# Altium PCB Microneedle_Patch_Mirrored.PcbDoc
Units mm, origin at the board's own origin, x right, y up, seen from the top; angles counter-clockwise.
Board outline 30.8 x 93 mm, 2 copper layers (Top, Bottom), stack 0.137 mm thick; 33 components, 33 nets, 708 pads, 16 vias.
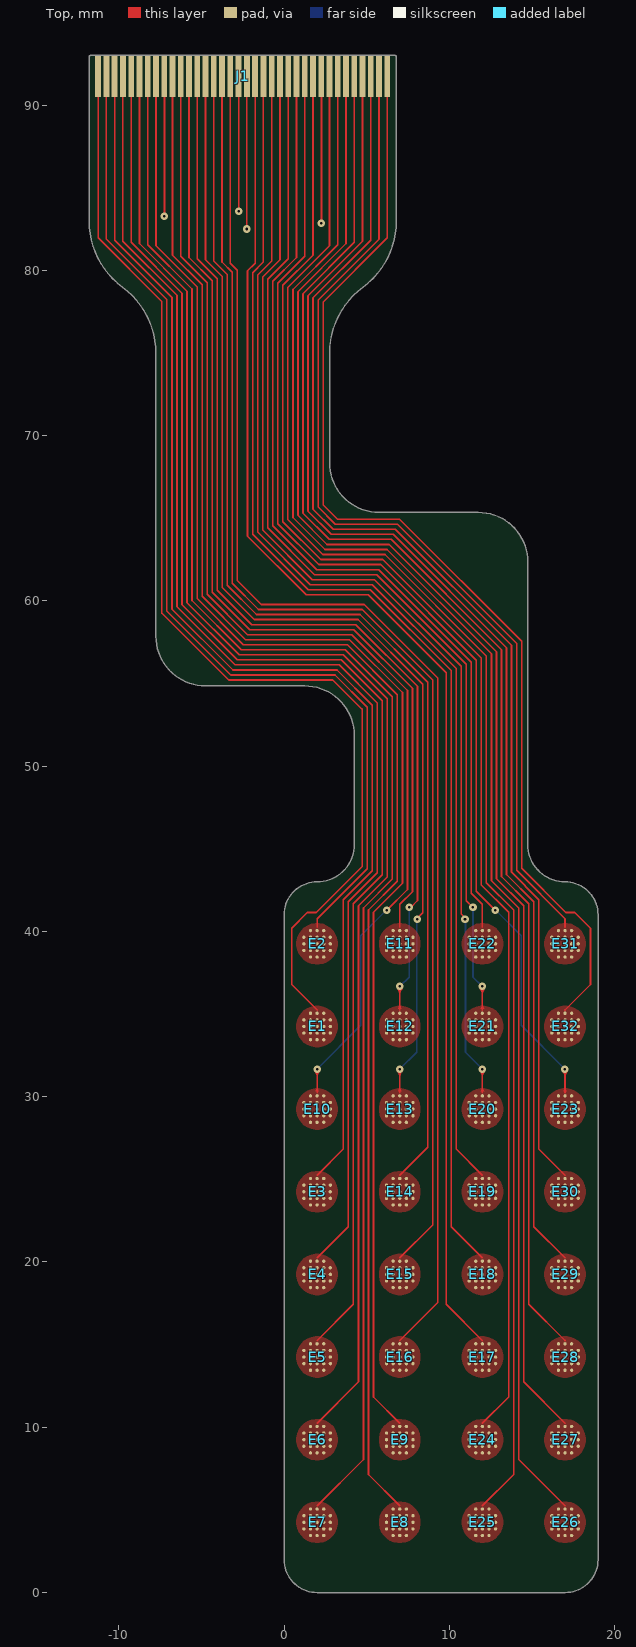
[diagram p0: Top view]
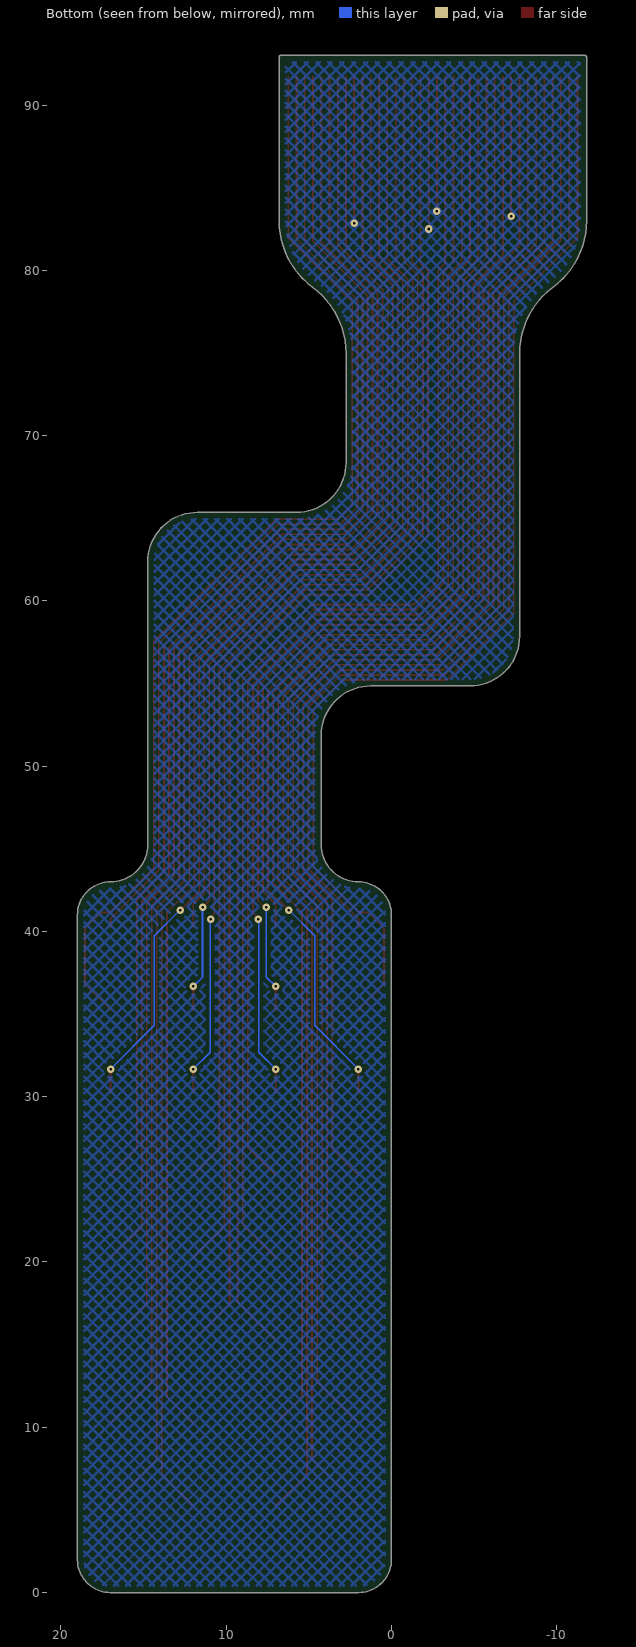
[diagram p1: Bottom view, seen from below]
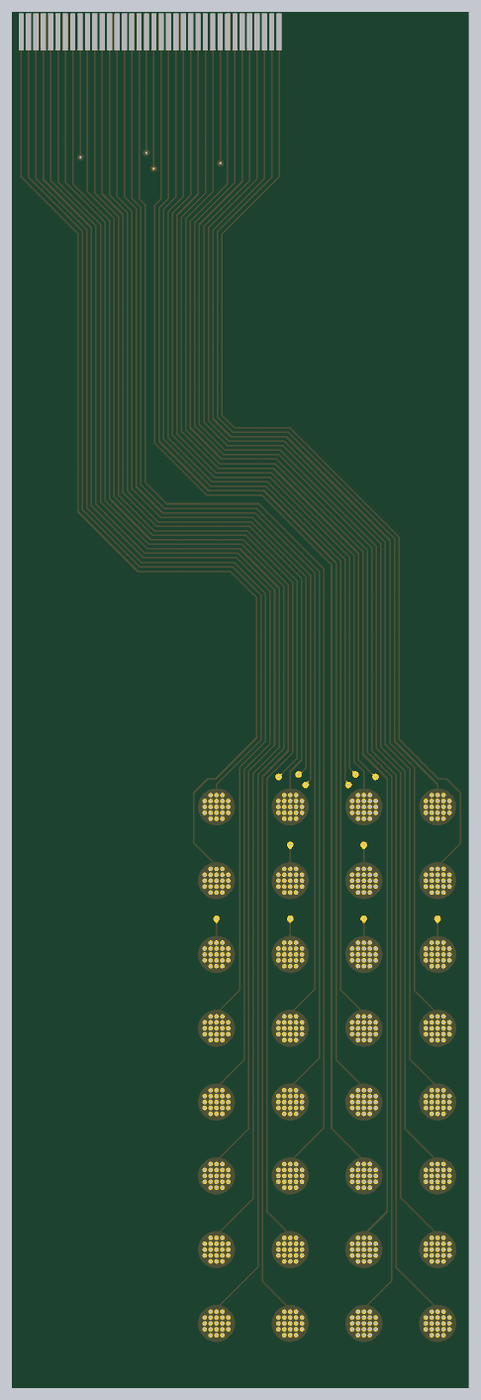
[diagram p2: 3D render of the assembled board from above, using the file's embedded part models]

## Layer stack, top to bottom
Board Layer Stack Top Coverlay: solder mask 0.025, Polymide, Dk 3.4
Adhesive 3: prepreg 0.025, Adhesive, Dk 3.3
Top: signal copper 0.018
Dielectric 1: core 0.013, Composite dielectric, Dk 3.3
Dielectric 3: core 0.025, Polymide, Dk 3.4
Dielectric 2: core 0.013, Composite dielectric, Dk 3.3
Bottom: signal copper 0.018
Adhesive 2: prepreg 0.025, Adhesive, Dk 3.3
Board Layer Stack Bottom Coverlay: solder mask 0.025, Polymide, Dk 3.4

## Board outline
0,41 cw(c2,41) 2,43 ccw(c2,45.25) 4.25,45.25 4.25,51.856 ccw(c1.25,51.856) 1.25,54.856 -4.75,54.856 cw(c-4.75,57.856) -7.75,57.856 -7.75,74.963 ccw(c-12.75,74.963) -9.775,78.981 cw(c-6.8,83) -11.8,83 -11.8,92.9 cw(c-11.7,92.9) -11.7,93 6.7,93 cw(c6.7,92.9) 6.8,92.9 6.8,83 cw(c1.8,83) 4.775,78.981 ccw(c7.75,74.963) 2.75,74.963 2.75,68.356 ccw(c5.75,68.356) 5.75,65.356 11.75,65.356 cw(c11.75,62.356) 14.75,62.356 14.75,45.25 ccw(c17,45.25) 17,43 cw(c17,41) 19,41 19,2 cw(c17,2) 17,0 2,0 cw(c2,2) 0,2

## Design rules (kind name [scope] priority, off if disabled: settings)
BoardOutlineClearance ZIF_BoardEdge [InPadClass('ZIF_Pads')] p1: gap=0.305 ignorepadtopadclearanceinfootprint=FALSE except(0: SMDPad-OutlineEdge)
BoardOutlineClearance [All] p2: gap=0.305 ignorepadtopadclearanceinfootprint=FALSE
Clearance [All] p1: gap=0.203 ignorepadtopadclearanceinfootprint=TRUE except(0.127: Arc-SMDPad Track-SMDPad SMDPad-SMDPad)
ComponentClearance [All] p1: gap=0.102 collisioncheckmode=3 verticalgap=0.102 showdistances=FALSE
HoleSize [All] p1: absolutevalues=TRUE maxlimit=25.4 minlimit=0.102 maxpercent=80.000 minpercent=20.000
HoleToHoleClearance [All] p1: gap=0.254 allowstackedmicrovias=FALSE
MinimumSolderMaskSliver [All] p1: minsoldermaskwidth=0.102
PlaneClearance [All] p1: clearance=0.152
PlaneConnect [All] p1: pad.planeconnectstyle=Relief pad.reliefexpansion=0.508 pad.reliefentries=4 pad.reliefconductorwidth=0.254 pad.reliefairgap=0.254 via.planeconnectstyle=Direct via.reliefexpansion=0.508 via.reliefentries=4 via.reliefconductorwidth=0.254 via.reliefairgap=0.254
PolygonConnect [All] p1: thpad.connectstyle=Relief thpad.reliefconductorwidth=0.254 thpad.reliefentries=4 thpad.polygonreliefangle="90 Angle" thpad.airgapwidth=0.254 smdpad.connectstyle=Direct smdpad.reliefconductorwidth=0.254 smdpad.reliefentries=4 smdpad.polygonreliefangle="90 Angle" smdpad.airgapwidth=0.254 via.connectstyle=Direct via.reliefconductorwidth=0.254 via.reliefentries=4 via.polygonreliefangle="90 Angle" via.airgapwidth=0.254
RoutingVias [All] p1: holewidth=0.152 width=0.457 viastyle="Through Hole" minholewidth=0.152 minwidth=0.457 maxholewidth=0.152 maxwidth=0.457
SilkToSilkClearance [All] p1: silktosilkclearance=0.102
SilkToSolderMaskClearance [IsPad] p1: minsilkscreentomaskgap=0.051 clearancetoexposedcopper=FALSE
SolderMaskExpansion [All] p1: expansion=0.051 istentingtop=FALSE
SupplyNets "Schematic Supply Nets" [InNet('GND')] p1: voltage=0.000
Width [All] p1: maxlimit=0.102 minlimit=0.102 preferedwidth=0.102 minimp=50.000000 maximp=50.000000 favimp=50.000000
22 further rules are at their usual default settings.

## Classes and differential pairs
pad class ZIF_Pads: J1-1 J1-2 J1-3 J1-4 J1-5 J1-6 J1-7 J1-8 J1-9 J1-10 J1-11 J1-12 J1-13 J1-14 J1-15 J1-16 J1-17 J1-18 J1-19 J1-20 J1-21 J1-22 J1-23 J1-24 J1-25 J1-26 J1-27 J1-28 J1-29 J1-30 J1-31 J1-32 J1-33 J1-34 J1-35 J1-36
component class Main: E1 E2 E4 E6 E27

## Components (designator, comment, footprint, x,y, rotation, side; value= is the part's Value field where it differs from the comment)
E1 "2.5 mm" PCBComponent_1 2,34.25 r0 top
E2 "2.5 mm" PCBComponent_1 2,39.25 r0 top
E3 "2.5 mm" PCBComponent_1 2,24.25 r0 top
E4 "2.5 mm" PCBComponent_1 2,19.25 r0 top
E5 "2.5 mm" PCBComponent_1 2,14.25 r0 top
E6 "2.5 mm" PCBComponent_1 2,9.25 r0 top
E7 "2.5 mm" PCBComponent_1 2,4.25 r0 top
E8 "2.5 mm" PCBComponent_1 7,4.25 r0 top
E9 "2.5 mm" PCBComponent_1 7,9.25 r0 top
E10 "2.5 mm" PCBComponent_1 2,29.25 r0 top
E11 "2.5 mm" PCBComponent_1 7,39.25 r0 top
E12 "2.5 mm" PCBComponent_1 7,34.25 r0 top
E13 "2.5 mm" PCBComponent_1 7,29.25 r0 top
E14 "2.5 mm" PCBComponent_1 7,24.25 r0 top
E15 "2.5 mm" PCBComponent_1 7,19.25 r0 top
E16 "2.5 mm" PCBComponent_1 7,14.25 r0 top
E17 "2.5 mm" PCBComponent_1 12,14.25 r0 top
E18 "2.5 mm" PCBComponent_1 12,19.25 r0 top
E19 "2.5 mm" PCBComponent_1 12,24.25 r0 top
E20 "2.5 mm" PCBComponent_1 12,29.25 r0 top
E21 "2.5 mm" PCBComponent_1 12,34.25 r0 top
E22 "2.5 mm" PCBComponent_1 12,39.25 r0 top
E23 "2.5 mm" PCBComponent_1 17,29.25 r0 top
E24 "2.5 mm" PCBComponent_1 12,9.25 r0 top
E25 "2.5 mm" PCBComponent_1 12,4.25 r0 top
E26 "2.5 mm" PCBComponent_1 17,4.25 r0 top
E27 "2.5 mm" PCBComponent_1 17,9.25 r0 top
E28 "2.5 mm" PCBComponent_1 17,14.25 r0 top
E29 "2.5 mm" PCBComponent_1 17,19.25 r0 top
E30 "2.5 mm" PCBComponent_1 17,24.25 r0 top
E31 "2.5 mm" PCBComponent_1 17,39.25 r0 top
E32 "2.5 mm" PCBComponent_1 17,34.25 r0 top
J1 "XF2M-3615-1A" CONN_FPC_2X18_0MM5 -2.5,91.75 r0 top

## Footprints (in the part's own frame and the unit in brackets; to place one, negate y for a bottom-side part, rotate by r counter-clockwise, add the part's x,y. Pads: shape width x height; smd on the part's side, far side on the other; paste and mask are expansions set on the pad)
CONN_FPC_2X18_0MM5 [mm] "Compatible with XF2M-3615-1A / 0.5 mm pitch, 2X18"
  rect 0.35x2.5 smd mask+0: 1(-8.75,0) 2(-8.25,0) 3(-7.75,0) 4(-7.25,0) 5(-6.75,0) 6(-6.25,0) 7(-5.75,0) 8(-5.25,0) 9(-4.75,0) 10(-4.25,0) 11(-3.75,0) 12(-3.25,0) 13(-2.75,0) 14(-2.25,0) 15(-1.75,0) 16(-1.25,0) 17(-0.75,0) 18(-0.25,0) 19(0.25,0) 20(0.75,0) 21(1.25,0) 22(1.75,0) 23(2.25,0) 24(2.75,0) 25(3.25,0) 26(3.75,0) 27(4.25,0) 28(4.75,0) 29(5.25,0) 30(5.75,0) 31(6.25,0) 32(6.75,0) 33(7.25,0) 34(7.75,0) 35(8.25,0) 36(8.75,0)
PCBComponent_1 [mm]
  round 0.2 smd paste+0 mask+0.05: 1(-0.8,-0.4) 1(-0.8,0) 1(-0.8,0.4) 1(-0.4,-0.8) 1(-0.4,-0.4) 1(-0.4,0) 1(-0.4,0.4) 1(-0.4,0.8) 1(0,-0.8) 1(0,-0.4) 1(0,0) 1(0,0.4) 1(0,0.8) 1(0.4,-0.8) 1(0.4,-0.4) 1(0.4,0) 1(0.4,0.4) 1(0.4,0.8) 1(0.8,-0.4) 1(0.8,0) 1(0.8,0.4)
  body extent -0.82,-0.82 0.82,0.82, height 0.4

## Part data
E1 E2 E3 E4 E5 E6 E7 E8 E9 E10 E11 E12 E13 E14 E15 E16 E17 E18 E19 E20 E21 E22 E23 E24 E25 E26 E27 E28 E29 E30 E31 E32: library part SENSE_UNEEDLE, "Microneedle electrode - 2.5 mm diameter"
J1: library part CONN_FPC_2X18_0MM5, "FPC Connector - FPC Side. 0.5 mm pitch / Compatible with XF2M-3615-1A", GRAMS Lib Spec=2.7

## Via types
v1: diameter 0.457, hole 0.152, Top to Bottom, 16 vias

## Nets (pads, with @x,y where several pads share a name; then routed paths per layer and width w, separated by ;. In a path a pad name is that pad's centre, name@x,y a point inside that pad or via, vN(x,y) a via of type N, cw(c..) or ccw(c..) an arc to the next point about the centre after c; other vN are vias at no path point)
GND: J1.9 J1.18 J1.19 J1.28 | length 34.8
  Top w0.102: J1.9 -7.236,91.736 v1(-7.236,83.261) ; v1(-2.75,83.566) J1.18 ; v1(-2.258,82.499) -2.258,91.742 J1.19 ; J1.28 2.264,91.736 v1(2.264,82.855)
Input1: E1.1 J1.1 | length 69.5
  Top w0.102: J1.1 -11.25,81.964 -7.394,78.109 -7.394,59.261 -7.365,59.231 -3.346,55.212 2.955,55.212 4.624,53.543 4.724,53.442 4.724,43.924 1.947,41.147 1.408,41.147 0.457,40.196 0.457,36.793 2,35.25
Input2: E2.1 J1.2 | length 63
  Top w0.102: J1.2 -10.75,81.895 -7.09,78.235 -7.09,59.387 -3.22,55.517 3.081,55.517 5.03,53.568 5.03,43.799 2,40.769 2,40.25
Input3: E3.1 J1.3 | length 78
  Top w0.102: J1.3 -10.25,81.827 -6.785,78.361 -6.785,59.513 -3.093,55.822 3.207,55.822 5.334,53.695 5.334,43.672 3.586,41.924 3.586,26.836 2,25.25
Input4: E4.1 J1.4 | length 83.1
  Top w0.102: J1.4 -9.75,81.758 -6.48,78.488 -6.48,59.639 -2.967,56.126 3.334,56.126 5.639,53.821 5.639,43.546 3.89,41.797 3.89,22.14 2,20.25
Input5: E5.1 J1.5 | length 88.1
  Top w0.102: J1.5 -9.25,81.689 -6.175,78.614 -6.175,59.766 -2.841,56.431 3.46,56.431 5.944,53.947 5.944,43.42 4.195,41.671 4.195,17.445 2,15.25
Input6: E6.1 J1.6 | length 93.2
  Top w0.102: J1.6 -8.75,81.62 -5.87,78.74 -5.87,59.892 -2.715,56.736 3.586,56.736 6.249,54.073 6.249,43.294 4.5,41.545 4.5,12.75 2,10.25
Input7: E7.1 J1.7 | length 98.2
  Top w0.102: J1.7 -8.25,81.551 -5.566,78.866 -5.566,60.018 -2.588,57.041 3.712,57.041 6.554,54.2 6.554,43.167 4.805,41.418 4.805,8.055 2,5.25
Input8: E8.1 J1.8 | length 97.7
  Top w0.102: J1.8 -7.75,81.482 -5.261,78.993 -5.261,60.144 -2.462,57.346 3.839,57.346 6.858,54.326 6.858,43.041 5.11,41.292 5.11,7.14 7,5.25
Input9: E9.1 J1.10 | length 92.3
  Top w0.102: J1.10 -6.75,80.913 -4.956,79.119 -4.956,60.271 -2.336,57.65 3.965,57.65 7.163,54.452 7.163,42.915 5.414,41.166 5.414,11.836 7,10.25
Input10: E10.1 J1.11 | length 73.2
  Top w0.102: J1.11 -6.25,80.844 -4.651,79.245 -4.651,60.397 -2.21,57.955 4.091,57.955 7.468,54.578 7.468,42.537 v1(6.213,41.282) ; 2,30.25 2,31.667 v1(2.007,31.674)
  Bottom w0.102: v1(2.007,31.674) 4.648,34.315 4.648,39.737 6.203,41.292 v1(6.213,41.282)
Input11: E11.1 J1.12 | length 61.1
  Top w0.102: J1.12 -5.75,80.775 -4.346,79.371 -4.346,60.523 -2.083,58.26 4.217,58.26 7.773,54.705 7.773,42.411 7,41.638 7,40.25
Input12: E12.1 J1.13 | length 66.2
  Top w0.102: J1.13 -5.25,80.706 -4.042,79.498 -4.042,60.649 -1.957,58.565 4.344,58.565 8.078,54.831 8.078,41.87 7.661,41.453 v1(7.569,41.453) ; 7,35.25 7,36.667 v1(7.007,36.674)
  Bottom w0.102: v1(7.007,36.674) 7.569,37.236 v1(7.569,41.453)
Input13: E13.1 J1.14 | length 71.2
  Top w0.102: J1.14 -4.75,80.637 -3.737,79.624 -3.737,60.812 -1.794,58.87 4.47,58.87 8.382,54.957 8.382,41.128 8.052,40.798 v1(8.052,40.742) ; 7,30.25 7,31.667 v1(7.007,31.674)
  Bottom w0.102: v1(7.007,31.674) 8.026,32.694 8.026,40.716 v1(8.052,40.742)
Input14: E14.1 J1.15 | length 76.2
  Top w0.102: J1.15 -4.25,80.568 -3.432,79.75 -3.432,60.938 -1.668,59.174 4.596,59.174 8.687,55.083 8.687,26.937 7,25.25
Input15: E15.1 J1.16 | length 81.3
  Top w0.102: J1.16 -3.75,80.499 -3.127,79.876 -3.127,61.065 -1.542,59.479 4.722,59.479 8.992,55.21 8.992,51.562 8.992,22.242 7,20.25
Input16: E16.1 J1.17 | length 86.3
  Top w0.102: J1.17 -3.25,80.43 -2.822,80.003 -2.822,61.233 -1.373,59.784 4.849,59.784 9.297,55.336 9.297,51.562 9.297,17.547 7,15.25
Input17: E17.1 J1.20 | length 84.8
  Top w0.102: J1.20 -1.75,80.43 -2.207,79.973 -2.207,63.912 1.337,60.368 5.094,60.368 9.804,55.657 9.804,51.562 9.804,17.446 12,15.25
Input18: E18.1 J1.21 | length 79.7
  Top w0.102: J1.21 -1.25,80.499 -1.902,79.847 -1.902,64.038 1.464,60.672 5.22,60.672 10.109,55.783 10.109,51.562 10.109,22.141 12,20.25
Input19: E19.1 J1.22 | length 74.7
  Top w0.102: J1.22 -0.75,80.568 -1.597,79.721 -1.597,64.164 1.59,60.977 5.346,60.977 10.414,55.91 10.414,26.836 12,25.25
Input20: E20.1 J1.23 | length 69.6
  Top w0.102: J1.23 -0.25,80.637 -1.292,79.595 -1.292,64.291 1.716,61.282 5.473,61.282 10.719,56.036 10.719,41.051 10.948,40.822 v1(10.948,40.742) ; 12,30.25 v1@12,31.667
  Bottom w0.102: v1(10.948,40.742) 10.974,40.716 10.974,32.694 v1(11.993,31.674)
Input21: E21.1 J1.24 | length 64.6
  Top w0.102: J1.24 0.25,80.706 -0.988,79.468 -0.988,64.417 1.842,61.587 5.599,61.587 11.024,56.162 11.024,41.86 v1(11.431,41.453) ; 12,35.25 v1@12,36.667
  Bottom w0.102: v1(11.431,41.453) 11.431,37.236 v1(11.993,36.674)
Input22: E22.1 J1.25 | length 59.5
  Top w0.102: J1.25 0.75,80.775 -0.683,79.342 -0.683,64.543 1.969,61.892 5.725,61.892 11.328,56.288 11.328,42.31 12,41.638 12,40.25
Input23: E23.1 J1.26 | length 71.6
  Top w0.102: J1.26 1.25,80.844 -0.378,79.216 -0.378,64.669 2.095,62.196 5.851,62.196 11.633,56.415 11.633,42.436 v1(12.787,41.282) ; 17,30.25 v1@17,31.667
  Bottom w0.102: v1(12.787,41.282) 12.797,41.292 14.352,39.737 14.352,34.315 v1(16.993,31.674)
Input24: E24.1 J1.27 | length 90.8
  Top w0.102: J1.27 1.75,80.913 -0.073,79.09 -0.073,64.796 2.221,62.501 5.978,62.501 11.938,56.541 11.938,42.814 13.586,41.166 13.586,11.836 12,10.25
Input25: E25.1 J1.29 | length 96.2
  Top w0.102: J1.29 2.75,81.482 0.232,78.963 0.232,64.922 2.347,62.806 6.104,62.806 12.243,56.667 12.243,42.94 13.89,41.292 13.89,7.14 12,5.25
Input26: E26.1 J1.30 | length 96.6
  Top w0.102: J1.30 3.25,81.551 0.536,78.837 0.536,65.048 2.474,63.111 6.23,63.111 12.548,56.793 12.548,43.066 14.195,41.418 14.195,8.055 17,5.25
Input27: E27.1 J1.31 | length 91.6
  Top w0.102: J1.31 3.75,81.62 0.841,78.711 0.841,65.174 2.6,63.416 6.356,63.416 12.852,56.92 12.852,43.192 14.5,41.545 14.5,12.75 17,10.25
Input28: E28.1 J1.32 | length 86.6
  Top w0.102: J1.32 4.25,81.689 1.146,78.585 1.146,65.301 2.726,63.72 6.483,63.72 13.157,57.046 13.157,43.319 14.805,41.671 14.805,17.445 17,15.25
Input29: E29.1 J1.33 | length 81.5
  Top w0.102: J1.33 4.75,81.758 1.451,78.458 1.451,65.427 2.852,64.025 6.609,64.025 13.462,57.172 13.462,43.445 15.11,41.797 15.11,22.14 17,20.25
Input30: E30.1 J1.34 | length 76.5
  Top w0.102: J1.34 5.25,81.827 1.756,78.332 1.756,65.553 2.979,64.33 6.735,64.33 13.767,57.298 13.767,43.571 15.414,41.924 15.414,26.836 17,25.25
Input31: E31.1 J1.35 | length 61.4
  Top w0.102: J1.35 5.75,81.895 2.06,78.206 2.06,65.679 3.105,64.635 6.861,64.635 14.072,57.425 14.072,43.697 17,40.769 17,40.25
Input32: E32.1 J1.36 | length 68
  Top w0.102: J1.36 6.25,81.964 2.365,78.08 2.365,65.806 3.231,64.94 6.988,64.94 14.376,57.551 14.376,43.824 17.053,41.147 17.592,41.147 18.543,40.196 18.543,36.793 17,35.25

## Polygon pours and split planes (outlines as drawn)
Input31 on Top "Electrode31" (solid, pour order 5): 17,40.5 cw(c17,39.25) 18.25,39.25 cw(c17,39.25) 17,38 cw(c17,39.25) 15.75,39.25 cw(c17,39.25)
Input18 on Top "Electrode18" (solid, pour order 27): 12,20.5 cw(c12,19.25) 13.25,19.25 cw(c12,19.25) 12,18 cw(c12,19.25) 10.75,19.25 cw(c12,19.25)
Input26 on Top "Electrode26" (solid, pour order 28): 17,5.5 cw(c17,4.25) 18.25,4.25 cw(c17,4.25) 17,3 cw(c17,4.25) 15.75,4.25 cw(c17,4.25)
Input32 on Top "Electrode32" (solid, pour order 0): 17,35.5 cw(c17,34.25) 18.25,34.25 cw(c17,34.25) 17,33 cw(c17,34.25) 15.75,34.25 cw(c17,34.25)
Input16 on Top "Electrode16" (solid, pour order 31): 7,15.5 cw(c7,14.25) 8.25,14.25 cw(c7,14.25) 7,13 cw(c7,14.25) 5.75,14.25 cw(c7,14.25)
Input14 on Top "Electrode14" (solid, pour order 23): 7,25.5 cw(c7,24.25) 8.25,24.25 cw(c7,24.25) 7,23 cw(c7,24.25) 5.75,24.25 cw(c7,24.25)
Input25 on Top "Electrode25" (solid, pour order 29): 12,5.5 cw(c12,4.25) 13.25,4.25 cw(c12,4.25) 12,3 cw(c12,4.25) 10.75,4.25 cw(c12,4.25)
Input1 on Top "Electrode1" (solid, pour order 4): 2,35.5 cw(c2,34.25) 3.25,34.25 cw(c2,34.25) 2,33 cw(c2,34.25) 0.75,34.25 cw(c2,34.25)
Input19 on Top "Electrode19" (solid, pour order 22): 12,25.5 cw(c12,24.25) 13.25,24.25 cw(c12,24.25) 12,23 cw(c12,24.25) 10.75,24.25 cw(c12,24.25)
Input12 on Top "Electrode12" (solid, pour order 15): 7,35.5 cw(c7,34.25) 8.25,34.25 cw(c7,34.25) 7,33 cw(c7,34.25) 5.75,34.25 cw(c7,34.25)
Input11 on Top "Electrode11" (solid, pour order 10): 7,40.5 cw(c7,39.25) 8.25,39.25 cw(c7,39.25) 7,38 cw(c7,39.25) 5.75,39.25 cw(c7,39.25)
Input9 on Top "Electrode9" (solid, pour order 3): 7,10.5 cw(c7,9.25) 8.25,9.25 cw(c7,9.25) 7,8 cw(c7,9.25) 5.75,9.25 cw(c7,9.25)
Input3 on Top "Electrode3" (solid, pour order 9): 2,25.5 cw(c2,24.25) 3.25,24.25 cw(c2,24.25) 2,23 cw(c2,24.25) 0.75,24.25 cw(c2,24.25)
Input4 on Top "Electrode4" (solid, pour order 16): 2,20.5 cw(c2,19.25) 3.25,19.25 cw(c2,19.25) 2,18 cw(c2,19.25) 0.75,19.25 cw(c2,19.25)
Input5 on Top "Electrode5" (solid, pour order 17): 2,15.5 cw(c2,14.25) 3.25,14.25 cw(c2,14.25) 2,13 cw(c2,14.25) 0.75,14.25 cw(c2,14.25)
Input6 on Top "Electrode6" (solid, pour order 24): 2,10.5 cw(c2,9.25) 3.25,9.25 cw(c2,9.25) 2,8 cw(c2,9.25) 0.75,9.25 cw(c2,9.25)
Input7 on Top "Electrode7" (solid, pour order 25): 2,5.5 cw(c2,4.25) 3.25,4.25 cw(c2,4.25) 2,3 cw(c2,4.25) 0.75,4.25 cw(c2,4.25)
Input8 on Top "Electrode8" (solid, pour order 32): 7,5.5 cw(c7,4.25) 8.25,4.25 cw(c7,4.25) 7,3 cw(c7,4.25) 5.75,4.25 cw(c7,4.25)
Input15 on Top "Electrode15" (solid, pour order 26): 7,20.5 cw(c7,19.25) 8.25,19.25 cw(c7,19.25) 7,18 cw(c7,19.25) 5.75,19.25 cw(c7,19.25)
Input2 on Top "Electrode2" (solid, pour order 8): 2,40.5 cw(c2,39.25) 3.25,39.25 cw(c2,39.25) 2,38 cw(c2,39.25) 0.75,39.25 cw(c2,39.25)
Input20 on Top "Electrode20" (solid, pour order 14): 12,30.5 cw(c12,29.25) 13.25,29.25 cw(c12,29.25) 12,28 cw(c12,29.25) 10.75,29.25 cw(c12,29.25)
Input21 on Top "Electrode21" (solid, pour order 19): 12,35.5 cw(c12,34.25) 13.25,34.25 cw(c12,34.25) 12,33 cw(c12,34.25) 10.75,34.25 cw(c12,34.25)
Input22 on Top "Electrode22" (solid, pour order 11): 12,40.5 cw(c12,39.25) 13.25,39.25 cw(c12,39.25) 12,38 cw(c12,39.25) 10.75,39.25 cw(c12,39.25)
Input23 on Top "Electrode23" (solid, pour order 6): 17,30.5 cw(c17,29.25) 18.25,29.25 cw(c17,29.25) 17,28 cw(c17,29.25) 15.75,29.25 cw(c17,29.25)
Input13 on Top "Electrode13" (solid, pour order 18): 7,30.5 cw(c7,29.25) 8.25,29.25 cw(c7,29.25) 7,28 cw(c7,29.25) 5.75,29.25 cw(c7,29.25)
Input10 on Top "Electrode10" (solid, pour order 7): 2,30.5 cw(c2,29.25) 3.25,29.25 cw(c2,29.25) 2,28 cw(c2,29.25) 0.75,29.25 cw(c2,29.25)
Input29 on Top "Electrode29" (solid, pour order 13): 17,20.5 cw(c17,19.25) 18.25,19.25 cw(c17,19.25) 17,18 cw(c17,19.25) 15.75,19.25 cw(c17,19.25)
Input30 on Top "Electrode30" (solid, pour order 12): 17,25.5 cw(c17,24.25) 18.25,24.25 cw(c17,24.25) 17,23 cw(c17,24.25) 15.75,24.25 cw(c17,24.25)
Input24 on Top "Electrode24" (solid, pour order 2): 12,10.5 cw(c12,9.25) 13.25,9.25 cw(c12,9.25) 12,8 cw(c12,9.25) 10.75,9.25 cw(c12,9.25)
Input28 on Top "Electrode28" (solid, pour order 20): 17,15.5 cw(c17,14.25) 18.25,14.25 cw(c17,14.25) 17,13 cw(c17,14.25) 15.75,14.25 cw(c17,14.25)
Input27 on Top "Electrode27" (solid, pour order 21): 17,10.5 cw(c17,9.25) 18.25,9.25 cw(c17,9.25) 17,8 cw(c17,9.25) 15.75,9.25 cw(c17,9.25)
Input17 on Top "Electrode17" (solid, pour order 30): 12,15.5 cw(c12,14.25) 13.25,14.25 cw(c12,14.25) 12,13 cw(c12,14.25) 10.75,14.25 cw(c12,14.25)
no net on Layer0 "Default Coverlay 1 Top" (split plane): 176 vertices, not listed, extent 0,0 30.8,93
no net on Layer0 "Default Coverlay 1 Bottom" (split plane): 176 vertices, not listed, extent 0,0 30.8,93
GND on Bottom "GND_BOT" (hatched 45Degree grid 0.508 track 0.152, remove dead copper, pour order 34): 7.214,93.472 -12.548,93.472 -12.548,79.705 -8.89,76.048 -8.89,56.896 -6.401,54.407 2.032,54.407 4.013,52.426 4.013,43.993 3.048,43.028 0.864,43.028 -0.102,42.062 -0.102,0.965 1.118,-0.254 18.898,-0.254 18.898,9.093 18.898,41.808 14.75,45.956 14.75,63.533 11.633,66.65 4.623,66.65 3.048,68.224 3.048,75.59 7.214,79.756

## Silkscreen, mask and mechanical layers (free items; w line width, h text height)
Board Outline:
  circle w0.2: c9.5,0 r0.05
  lines w0.2: -11.8,83 ccw(c-6.8,83) -9.775,78.981 cw(c-12.75,74.963) -7.75,74.963 -7.75,57.856 ccw(c-4.75,57.856) -4.75,54.856 1.25,54.856 cw(c1.25,51.856) 4.25,51.856 4.25,45.25 cw(c2,45.25) 2,43 ccw(c2,41) 0,41 0,2 ccw(c2,2) 2,0 17,0 ccw(c17,2) 19,2 19,41 ccw(c17,41) 17,43 cw(c17,45.25) 14.75,45.25 14.75,62.356 ccw(c11.75,62.356) 11.75,65.356 5.75,65.356 cw(c5.75,68.356) 2.75,68.356 2.75,74.963 cw(c7.75,74.963) 4.775,78.981 ccw(c1.8,83) 6.8,83 6.8,92.9 ccw(c6.7,92.9) 6.7,93 -11.7,93 ccw(c-11.7,92.9) -11.8,92.9 -11.8,83
Manufacturing Notes:
  lines w0.2: -11.8,88.5 6.8,88.5 6.8,93 -11.8,93 -11.8,88.5
  lines w0.254: 50.486,52.07 117.796,52.07 117.796,55.88 50.486,55.88 50.486,59.69 117.796,59.69 117.796,63.5 50.486,63.5 50.486,67.31 117.796,67.31 117.796,71.12 50.486,71.12 50.486,74.93 117.796,74.93 117.796,78.74 50.486,78.74 50.486,82.55 117.796,82.55 117.796,83.82 ; 110.176,48.26 110.176,90.17 ; 110.176,93.98 110.176,90.17 ; 117.796,86.36 50.486,86.36 50.486,90.17 ; 50.486,90.17 64.456,90.17 ; 50.486,90.17 50.486,93.98 117.796,93.98 117.796,90.17 ; 50.486,90.17 50.486,48.26 117.796,48.26 117.796,90.17 ; 50.486,90.17 117.796,90.17 ; 64.456,90.17 64.456,93.98 77.156,93.98 77.156,90.17 ; 64.456,90.17 64.456,48.26 77.156,48.26 77.156,90.17 ; 77.156,90.17 87.316,90.17 ; 77.156,90.17 87.316,90.17 ; 87.316,90.17 87.316,93.98 101.286,93.98 101.286,90.17 ; 87.316,90.17 87.316,48.26 101.286,48.26 101.286,90.17 ; 101.286,90.17 110.176,90.17 ; 101.286,90.17 110.176,90.17 ; 110.176,90.17 117.796,90.17
  text "Bottom-side Polymide stiffener under ZIF tail." at 10,92.066 h1.52
  text "Type" at 54.55,91.726 h1.52
  text "Material" at 68.012,91.726 h1.52
  text "Weight" at 80.204,91.726 h1.52
  text "Dk" at 105.096,91.726 h1.52
  text "Thickness" at 90.872,91.694 h1.52
  text "Df" at 113.478,91.678 h1.52
  text "Polymide thickness: 0.088 mm" at 10,90.286 h1.52
  text "Adhesive thickness: 0.025 mm" at 10,88.239 h1.52
  text "Polymide" at 68.266,87.916 h1.52
  text "Top Coverlay" at 52.181,87.63 h1.52
  text "0.025 mm" at 91.126,87.647 h1.52
  text "3.4" at 105.096,87.63 h1.52
  text "0.015" at 112.716,87.647 h1.52
  text "Finished thickness in ZIF region: 0.30 mm." at 10,86.461 h1.52
  text "0.025 mm" at 91.126,83.837 h1.52
  text "Adhesive" at 52.181,83.549 h1.52
  text "Top Layer" at 52.181,80.01 h1.52
  text "0.018 mm" at 91.126,80.027 h1.52
  text "0.5 oz" at 79.696,79.741 h1.52
  text "0.013 mm" at 91.126,76.217 h1.52
  text "Adhesive" at 52.181,75.929 h1.52
  text "0.025 mm" at 91.126,72.407 h1.52
  text "3.4" at 105.096,72.407 h1.52
  text "0.015" at 112.716,72.39 h1.52
  text "Polymide" at 68.266,72.373 h1.52
  text "Core" at 52.181,72.121 h1.52
  text "0.013 mm" at 91.126,68.597 h1.52
  text "Adhesive" at 52.181,68.309 h1.52
  text "0.5 oz" at 80,64.9 h1.52
  text "Bottom Layer" at 52.181,64.77 h1.52
  text "0.018 mm" at 91.126,64.787 h1.52
  text "0.025 mm" at 91.126,60.977 h1.52
  text "Adhesive" at 52.181,60.689 h1.52
  text "Polymide" at 68.266,57.419 h1.52
  text "Bottom Coverlay" at 52.181,57.15 h1.52
  text "0.025 mm" at 91.126,57.167 h1.52
  text "3.4" at 105.096,57.167 h1.52
  text "0.015" at 112.716,57.15 h1.52
  text "0.025 mm" at 91.126,53.643 h1.52
  text "Adhesive" at 52.181,53.356 h1.52
  text "0.088 mm" at 91.126,49.833 h1.52
  text "3.4" at 105.096,49.833 h1.52
  text "0.015" at 112.716,49.816 h1.52
  text "Polymide" at 68.266,49.799 h1.52
  text "Bottom Stiffener" at 52.181,49.547 h1.52
  text "Finished thickness (with stiffener): 0.30 mm nominal" at 51,46 h1.52
  text "Finished thickness (without stiffener): 0.187 mm nominal" at 51,44 h1.52
  text "Substrate Finish: ENEPIG" at 51,42 h1.52
  text "Thickness of Immersion Gold: 4U\"" at 51,40.017 h1.52
Board Shape:
  circle w0.2: c9.5,0 r0.05
  lines w0.2: -11.8,83 ccw(c-6.8,83) -9.775,78.981 cw(c-12.75,74.963) -7.75,74.963 -7.75,57.856 ccw(c-4.75,57.856) -4.75,54.856 1.25,54.856 cw(c1.25,51.856) 4.25,51.856 4.25,45.25 cw(c2,45.25) 2,43 ccw(c2,41) 0,41 0,2 ccw(c2,2) 2,0 17,0 ccw(c17,2) 19,2 19,41 ccw(c17,41) 17,43 cw(c17,45.25) 14.75,45.25 14.75,62.356 ccw(c11.75,62.356) 11.75,65.356 5.75,65.356 cw(c5.75,68.356) 2.75,68.356 2.75,74.963 cw(c7.75,74.963) 4.775,78.981 ccw(c1.8,83) 6.8,83 6.8,92.9 ccw(c6.7,92.9) 6.7,93 -11.7,93 ccw(c-11.7,92.9) -11.8,92.9 -11.8,83
Stiffener:
  lines w0.2: -11.8,88.5 6.8,88.5 6.8,93 -11.8,93 -11.8,88.5
  text "Bottom-side Polymide stiffener under ZIF tail." at 10,92.066 h1.52
  text "Polymide thickness: 0.088 mm" at 10,90.286 h1.52
  text "Adhesive thickness: 0.025 mm" at 10,88.239 h1.52
  text "Finished thickness in ZIF region: 0.30 mm." at 10,86.461 h1.52